# Altium PCB PID_controller.PcbDoc
Units mil, origin at the board's own origin, x right, y up, seen from the top; angles counter-clockwise.
Board outline 3410 x 2715 mil, 2 copper layers (Top Layer, Bottom Layer); 18 components, 15 nets, 103 pads, 2 vias.
Unrouted connection lines stored in the file: 3.
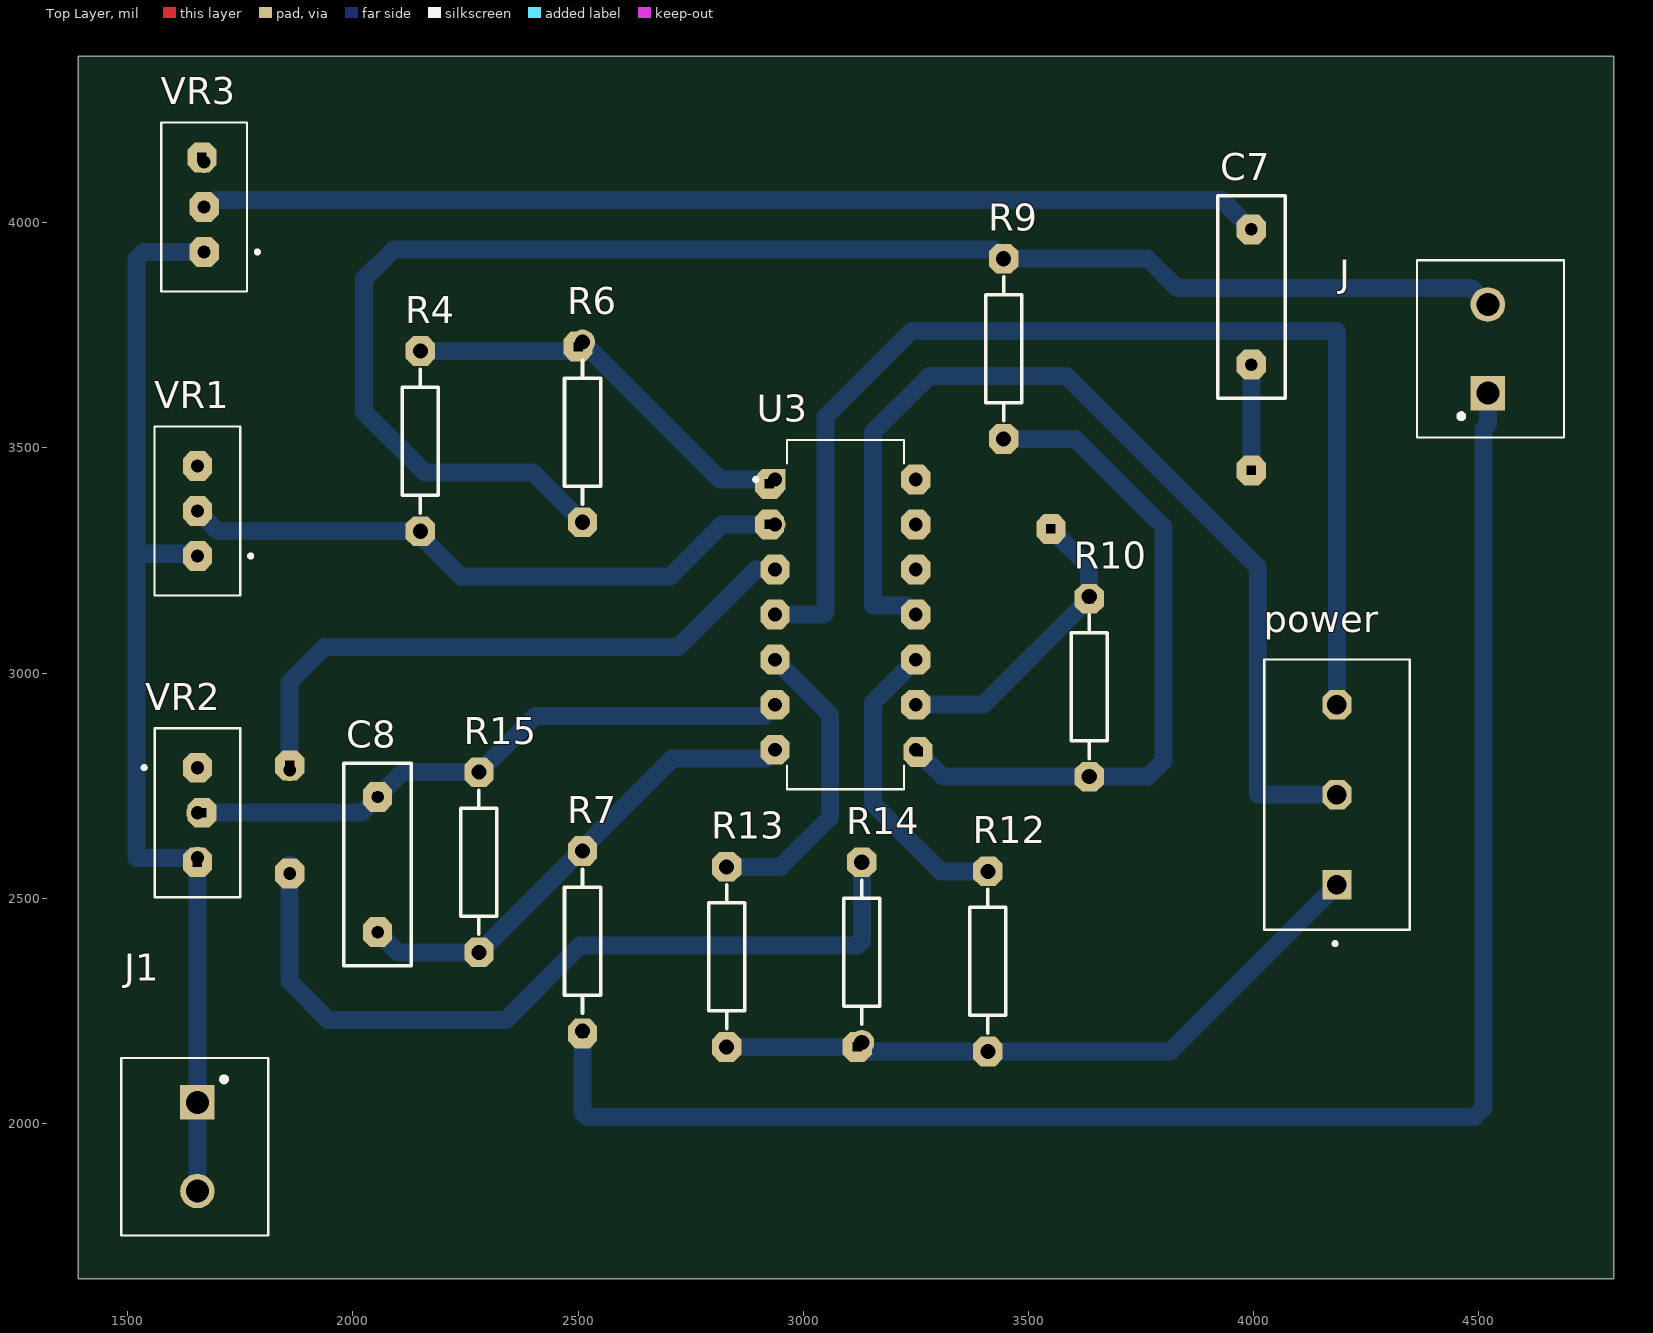
[diagram p0: Top Layer view]
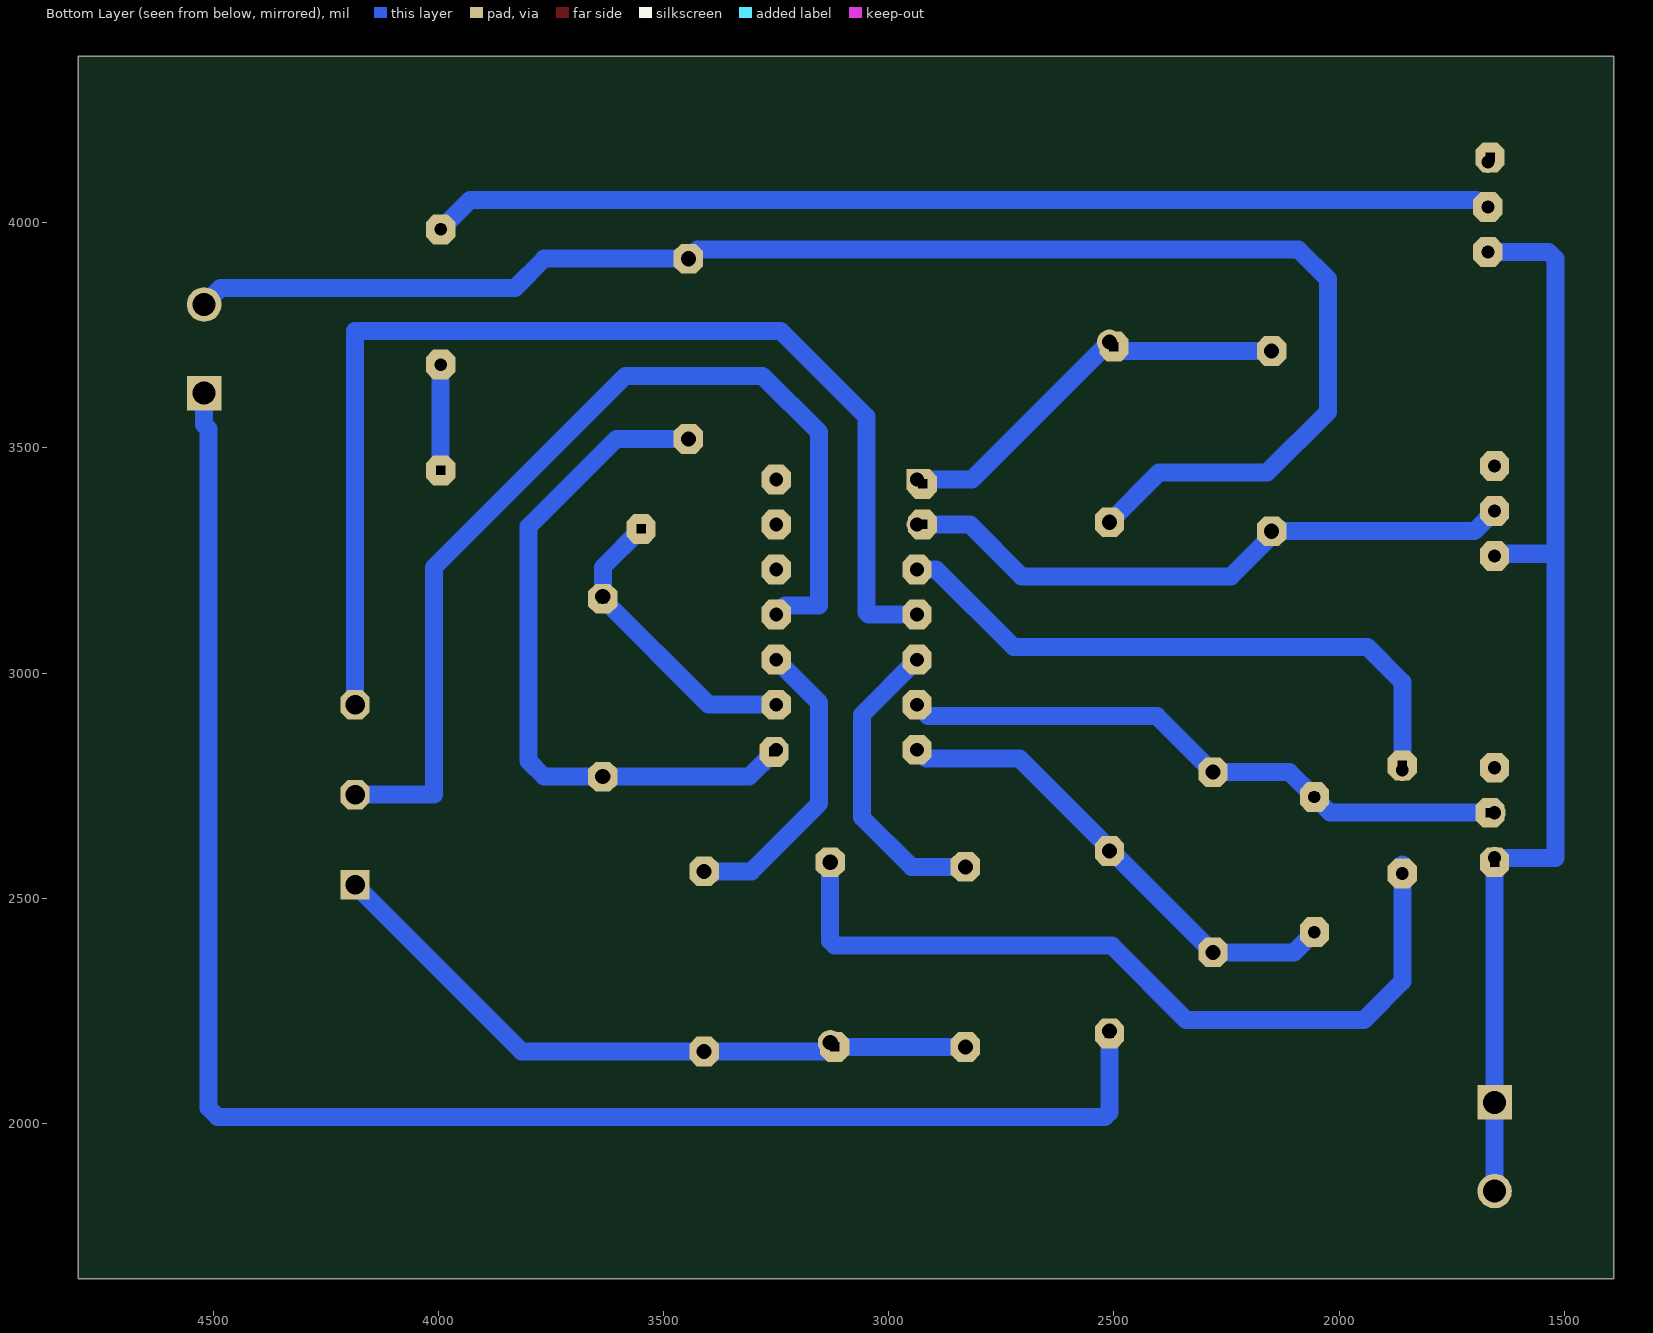
[diagram p1: Bottom Layer view, seen from below]

## Layer stack, top to bottom
Top Solder: solder mask 0.4, Solder Resist, Dk 3.5
Top Layer: signal copper 1.4
Dielectric 1: dielectric 12.6, FR-4, Dk 4.8
Bottom Layer: signal copper 1.4
Bottom Solder: solder mask 0.4, Solder Resist, Dk 3.5

## Board outline
1390,1655 4800,1655 4800,4370 1390,4370

## Design rules (kind name [scope] priority, off if disabled: settings)
Clearance [All] p1: gap=10 ignorepadtopadclearanceinfootprint=FALSE except(0: Arc-Hole Track-Hole SMDPad-Hole THPad-Hole Via-Hole Fill-Hole Poly-Hole Region-Hole Text-Hole; 20: Arc-Arc Arc-Track Track-Track)
PolygonConnect [All] p1: connectstyle=Relief reliefconductorwidth=10 reliefentries=4 polygonreliefangle="90 Angle" airgapwidth=10
RoutingVias [All] p1: holewidth=28 width=50 viastyle="Through Hole" minholewidth=28 minwidth=50 maxholewidth=28 maxwidth=50
SolderMaskExpansion [All] p1: expansion=4
Width [All] p1: maxlimit=40 minlimit=10 preferedwidth=40 toplayer_maxwidth=10 toplayer_prefwidth=10 bottomlayer_minwidth=40 minimp=50.000000 maximp=50.000000 favimp=50.000000
30 further rules are at their usual default settings.

## Classes and differential pairs
component class PID_controller: C7 C8 J1 power R4 R6 R7 R9 R10 R12 R13 R14 R15 U3 VR1 VR2 VR3

## Components (designator, comment, footprint, x,y, rotation, side; value= is the part's Value field where it differs from the comment)
C7 "Cap" RAD-0.3 3995,3835 r270 top value=22pF
C8 "Cap" RAD-0.3 2055,2575 r270 top value=22pF
J "1935161" PHOENIX_1935161 4520,3720 r90 top
J1 "1935161" PHOENIX_1935161 1655,1948.43 r270 top
power "282837-3" TE_282837-3 4185,2730 r90 top
R4 "Res2" AXIAL-0.4 2150,3515 r90 top value=1K
R6 "Res2" AXIAL-0.4 2510,3535 r270 top value=1K
R7 "Res2" AXIAL-0.4 2510,2405 r270 top value=1K
R9 "Res2" AXIAL-0.4 3445,3720 r90 top value=1K
R10 "Res2" AXIAL-0.4 3635,2970 r270 top value=4.7K
R12 "Res2" AXIAL-0.4 3410,2360 r90 top value=4.7K
R13 "Res2" AXIAL-0.4 2830,2370 r90 top value=4.7K
R14 "Res2" AXIAL-0.4 3130,2380 r90 top value=1K
R15 "Res2" AXIAL-0.4 2280,2580 r90 top value=4.7K
U3 "TL074IN" DIP794W45P254L1969H508Q14 3093.7,3130 r0 top
VR1 "3296W-1-100" TRIM_3296W-1-100 1655,3360 r180 top
VR2 "3296W-1-100" TRIM_3296W-1-100 1655,2690 r0 top
VR3 "3296W-1-100" TRIM_3296W-1-100 1670,4035 r180 top

## Footprints (in the part's own frame and the unit in brackets; to place one, negate y for a bottom-side part, rotate by r counter-clockwise, add the part's x,y. Pads: shape width x height; smd on the part's side, far side on the other; paste and mask are expansions set on the pad)
AXIAL-0.4 [mm] "Axial Device, Thru-Hole; 2 Leads; 0.4 in Pin Spacing"
  round 1.4 hole 0.85: 1(-5.08,0) 2(5.08,0)
  silkscreen extent -4.06,-1.02 4.06,1.02
DIP794W45P254L1969H508Q14 [mm]
  rect 1.17x1.17 hole 0.77: 1(-3.97,7.62)
  round 1.17 hole 0.77: 2(-3.97,5.08) 3(-3.97,2.54) 4(-3.97,0) 5(-3.97,-2.54) 6(-3.97,-5.08) 7(-3.97,-7.62) 8(3.97,-7.62) 9(3.97,-5.08) 10(3.97,-2.54) 11(3.97,0) 12(3.97,2.54) 13(3.97,5.08) 14(3.97,7.62)
  silkscreen extent -5.15,-9.84 3.3,9.84
PHOENIX_1935161 [mm]
  rect 1.95x1.95 hole 1.3: 1(-2.5,0)
  round 1.95 hole 1.3: 2(2.5,0)
  silkscreen extent -5,-4.3 5,4
RAD-0.3 [mm] "Radial Cap, Thru-Hole; 2 Leads; 0.3 in Pin Spacing"
  round 1.2 hole 0.7: 1(-3.81,0) 2(3.81,0)
  silkscreen extent -5.71,-1.91 5.71,1.91
TE_282837-3 [mm]
  rect 1.65x1.65 hole 1.1: 1(-5.08,0)
  round 1.65 hole 1.1: 2(0,0) 3(5.08,0)
  silkscreen extent -8.5,-4.1 7.62,4.1
TRIM_3296W-1-100 [mm]
  rect 1.248x1.248 hole 0.74: 1(0,2.54)
  round 1.248 hole 0.74: 2(0,0) 3(0,-2.54)
  silkscreen extent -3.1,-4.76 2.42,4.76

## Part data
C7 C8: "Capacitor", LatestRevisionDate=17-Jul-2002, LatestRevisionNote="Re-released for DXP Platform.", PackageDescription="Radial Cap, Thru-Hole; 2 Leads; 0.3 in Pin Spacing", PackageReference=RAD-0.3, Published=8-Jun-2000, Publisher="Altium Limited"
J J1: "2 Position Wire to Board Terminal Block Horizontal with Board 0.197 _5.00mm_ Through Hole", Package=None, Digi-Key_Part_Number=277-1667-ND, Digi-Key_Purchase_URL=https://www.digikey.ca/product-detail/en/phoenix-contact/1935161/277-1667-ND/568614?utm_source=snapeda&utm_medium=aggregator&utm_campaign=symbol, MF="Phoenix Contact", MP=1935161, SnapEDA_Link=https://www.snapeda.com/parts/1935161/Phoenix%20Contact/view-part/423515/?ref=snap
power: "Wire to Board 3 Position 5.08 mm Pitch 30-16 AWG Euro Style Terminal Block", Package=None, Digi-Key_Part_Number=A113321-ND, Digi-Key_Purchase_URL=https://www.digikey.in/product-detail/en/te-connectivity-amp-connectors/282837-3/A113321-ND/2187974?utm_source=snapeda&utm_medium=aggregator&utm_campaign=symbol, MF="TE Connectivity", MP=282837-3, SnapEDA_Link=https://www.snapeda.com/parts/282837-3/TE%20Connectivity%20AMP%20Connectors/view-part/2765182/?ref=snap, TE_purchase_URL=https://www.te.com/usa-en/product-282837-3.html?te_bu=Cor&te_type=disp&te_campaign=seda_glo_cor-seda-global-disp-prtnr-fy19-seda-model-bom-cta_sma-317_1&elqCampaignId=32493
R4 R6 R7 R9 R10 R12 R13 R14 R15: "Resistor", LatestRevisionDate=17-Jul-2002, LatestRevisionNote="Re-released for DXP Platform.", PackageDescription="Axial Device, Thru-Hole; 2 Leads; 0.4 in Pin Spacing", PackageReference=AXIAL-0.4, Published=8-Jun-2000, Publisher="Altium Limited"
U3: "J-FET Amplifier 4 Circuit 14-DIP", Package="DIP-14 Texas Instruments", Availability=Good, Check_prices=https://www.snapeda.com/parts/TL074IN/STMicroelectronics/view-part/481259/?ref=eda, MF=STMicroelectronics, MP=TL074IN, Price=None, Purchase-URL=https://pricing.snapeda.com/search/part/TL074IN/?ref=eda, SnapEDA_Link=https://www.snapeda.com/parts/TL074IN/STMicroelectronics/view-part/481259/?ref=snap
VR1 VR2 VR3: "10 Ohms 0.5W, 1/2W PC Pins Through Hole Trimmer Potentiometer Cermet 25 Turn Top Adjustment", Package="SOT-23-5 Bourns", Digi-Key_Part_Number=3296W-100LF-ND, MF=Bourns, Mouser-Purchase-URL=https://snapeda.com/shop?store=Mouser&id=1463245, MP=3296W-1-100, SnapEDA_Link=https://www.snapeda.com/parts/3296W-1-100/Bourns/view-part/1463245/?ref=snap

## Free pads (board coordinates)
  oct 65x66 hole 20 square: 2(3995,3450) 3(3550,3320) 4(1670,4035) 5(1670,3935) 6(1655,3360) 7(1655,3260) 8(1665,2690) 9(1655,2580) 10(2055,2425) 11(1860,2555) 12(1860,2795) 13(2055,2725) 14(2280,2780) 15(2280,2380) 16(2510,2605) 17(2510,2200) 18(2830,2170) 19(2830,2570) 20(3130,2580) 21(3120,2170) 22(3410,2160) 23(3410,2560) 24(3635,2770) 25(3255,2825) 26(3250,2930) 27(3250,3030) 28(3250,3130) 30(2937.4,3130) 31(2937.4,3230) 32(2925,3330) 33(2925,3420) 34(2937.4,2830) 35(2937.4,2930) 36(3995,3685) 37(3995,3985) 38(3445,3920) 39(3445,3520) 40(2510,3335) 41(2500,3725) 42(2150,3715) 43(2150,3315) 44(1655,3460) 45(1665,4145) 46(1655,2790) 47(4185,2930) 48(4185,2730) 49(3635,3165) 50(3250,3430) 51(3250,3330) 52(3250,3230) 53(2937.4,3030)

## Via types
v1: diameter 50, hole 28, Top Layer to Bottom Layer, 2 vias

## Nets (pads, with @x,y where several pads share a name; then routed paths per layer and width w, separated by ;. In a path a pad name is that pad's centre, name@x,y a point inside that pad or via, vN(x,y) a via of type N, cw(c..) or ccw(c..) an arc to the next point about the centre after c; other vN are vias at no path point)
D: pad.23 pad.27 R12.2 U3.10 | length 676.5
  Bottom Layer w40: U3.10 3155,2935 3155,2710 3305,2560 R12.2
GND: pad.18 pad.21 pad.22 power.1 R12.1 R13.1 R14.1 | length 1502.4
  Bottom Layer w40: R13.1 pad.21 R14.1 ; R14.1@3140,2160 R12.1 3815,2160 power.1
I: pad.19 pad.53 R13.2 U3.5 | length 676.3
  Bottom Layer w40: R13.2 2950,2570 3060,2680 3060,2907.4 U3.5
NetC7_1: C7.1 pad.4 pad.37 VR3.2 | length 2362.3
  Bottom Layer w40: VR3.2 1675,4030 1695,4050 3930,4050 C7.1
NetC7_2: C7.2 pad.2 pad.3 pad.26 pad.36 pad.49 R10.1 U3.9 | length 907.5
  Bottom Layer w40: U3.9 3400,2930 pad.49 R10.1 3635,3235 pad.3 ; pad.2 C7.2
NetC8_1: C8.1 pad.8 pad.13 pad.14 pad.35 R15.2 U3.6 VR2.2 | length 1381.8
  Bottom Layer w40: VR2.2 pad.8 2020,2690 C8.1 2110,2780 R15.2 2405,2905 2912.4,2905 U3.6
NetC8_2: C8.2 pad.10 pad.15 pad.16 pad.34 R7.1 R15.1 U3.7 | length 1087.4
  Bottom Layer w40: C8.2 2100,2380 R15.1 2710,2810 2917.4,2810 U3.7
NetJ1_1: J1.1 J1.2 pad.5 pad.7 pad.9 VR1.1 VR2.3 VR3.1 | length 2498.3
  Bottom Layer w40: J1.2 J1.1 pad.9 VR2.3 1520,2590 1520,3265 ; VR1.1 1650,3265 1520,3265 ; VR3.1 1535,3935 1520,3920 1520,3265
NetJ_1: J.1 J.2 pad.17 pad.38 pad.40 R6.2 R7.2 R9.2 | length 7236.9
  Bottom Layer w40: R7.2 pad.17 2510,2025 2520,2015 4490,2015 4510,2035 4510,3541.58 4520,3551.58 J.1 ; R6.2 2400,3445 2160,3445 2025,3580 2025,3875 2090,3940 3425,3940 R9.2 3765,3920 3830,3855 4483.43,3855 J.2
NetR4_1: pad.6 pad.32 pad.43 R4.1 U3.2 VR1.2 | length 1396
  Bottom Layer w40: VR1.2 1700,3315 R4.1 2150,3305 2240,3215 2705,3215 2820,3330 pad.32 U3.2
NetR4_2: pad.33 pad.41 pad.42 R4.2 R6.1 U3.1 | length 922
  Bottom Layer w40: R4.2 2490,3715 pad.41 R6.1 2815,3430 U3.1
NetR9_1: pad.24 pad.25 pad.39 R9.1 R10.2 U3.8 | length 1545.1
  Bottom Layer w40: U3.8 pad.25 3310,2770 R10.2 3765,2770 3800,2805 3800,3325 3605,3520 R9.1
P: pad.11 pad.12 pad.20 pad.31 R14.2 U3.3 | length 3188.7
  Bottom Layer w40: pad.11@1860,2575 v1(1860,2555) 1860,2315 1945,2230 2340,2230 2505,2395 3120,2395 3130,2405 R14.2 ; v1(1860,2785) pad.12 1860,2980 1937.6,3057.6 2722.6,3057.6 2895,3230 U3.3
VCC+: pad.30 pad.47 power.3 U3.4 | length 2593.4
  Bottom Layer w40: U3.4 3045,3130 3050,3135 3050,3570 3240,3760 4185,3760 power.3
VCC-: pad.28 pad.48 power.2 U3.11 | length 2251.1
  Bottom Layer w40: U3.11 3230,3150 3155,3150 3155,3535 3280,3660 3585,3660 4010,3235 4010,2730 power.2
pads on no net: U3.12 U3.13 U3.14 VR1.3 VR2.1 VR3.3

## Text inside footprints (layer, text, board x,y; h text height)
J: Mechanical 13 "VALUE" at 4770.63,3519.49 h50.13 r90; Mechanical 13 "NAME" at 4319.72,3519.72 h50.07 r90
J1: Mechanical 13 "NAME" at 1855.28,2148.7 h50.07 r270; Mechanical 13 "VALUE" at 1404.37,2148.93 h50.13 r270